# EAGLE board BlinkyBall (EAGLE 6.2)
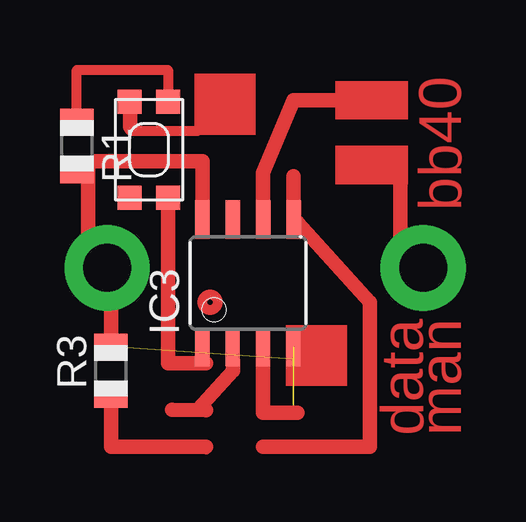
[diagram p0: board, top side]
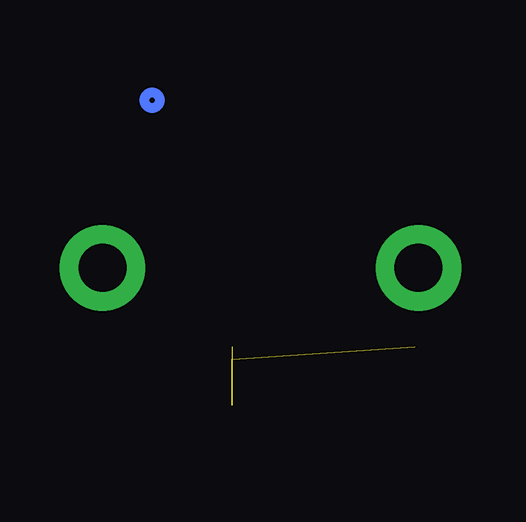
[diagram p1: board, bottom side, seen from below]

No outline drawn. Coordinates in mm, seen from the top.
Copper layers (1*16): Top 0.035mm / dielectric 1.5mm / Bottom 0.035mm
Design rules: minimum track width 10mil, minimum drill 24mil, track to track 8mil, track to pad 8mil, pad to pad 8mil, via to via 8mil, smd to smd 8mil, copper to edge 40mil, drill to drill 8mil, minimum pad ring 10mil, minimum via ring 8mil, stop-mask expansion 4mil, vias tented up to drill 0mil, thermal gap 10mil

## Footprints (pad centres in the part's own frame; a part is rotated, then mirrored left to right if it is on the bottom)
KMR2 = smd 1 x 1: 1 2,0.8; 2 2,-0.8; 3 -2,0.8; 4 -2,-0.8
8S1 = smd 0.6 x 1.6: 1 -1.905,-2.654; 2 -0.645,-2.654; 3 0.625,-2.654; 4 1.895,-2.654; 5 1.905,2.654; 6 0.635,2.654; 7 -0.635,2.654; 8 -1.905,2.654
R0805 = smd 1.1 x 1.4: 1 -1,0; 2 1,0

## Placement (x,y rotation side)
E$2  [KMR2]  5.87,14.92 90 top
IC3  TINY13-20SSU  [8S1]  10,9.37 0 top
R1  [R0805]  2.86,15.08 270 top
R3  [R0805]  4.29,5.71 90 top

## Library data of the parts
E$2 R1 R3 = adafruit
IC3 = atmel; MPN: ATTINY13-20SSU; OC_FARNELL: 1455133; OC_NEWARK: 58M3771

## Nets
N$25: IC3.5
N$26: IC3.2
N$27: IC3.3
N$28: R3.1
N$29: IC3.6
N$30: IC3.4 R3.2

## Tracks (layer width: path | path; a pad name or v marks a point on that pad's centre or on a via)
N$25
  Top 0.61: IC3.5 11.91,13.81
N$26
  Top 0.61: IC3.2 9.37,5.71 7.93,4.12 8.24,4.07 6.83,4.08
N$27
  Top 0.406: IC3.3 10.63,6.61
  Top 0.61: 10.63,6.61 10.64,4.08
N$28
  Top 0.406: 8.26,2.42 8.26,2.54
  Top 0.61: 8.26,2.54 4.29,2.54 R3.1
N$29
  Top 0.61: IC3.6 10.64,13.97 11.91,16.99 14.45,16.99
N$30  (3 unrouted)
  Top 0.406: IC3.4 11.9,6.83
  Top 0.61: 11.9,6.83 11.91,6.83 11.91,5.71
S$1
  Top 0.61: 8.1,11.91 8.1,13.81
S$2
  Top 0.61: 10.64,3.97 12.06,3.97 | 16.35,14.76 16.35,11.11
S$3  (via drill 2 pad 3.56)
  other vias: 17.3,10 4.13,10
S$4
  Top 0.406: 3.33,14.29 3.65,14.45
  Top 0.61: 3.33,11.43 3.33,14.29 | 3.65,14.45 8.1,14.45 8.1,13.81
S$5
  Top 0.406: 2.86,16.51 2.86,18.26 6.67,18.26 6.67,17.14
S$6
  Top 0.406: 5.08,15.72 7.94,15.72
S$7
  Top 0.61: 6.67,12.86 6.67,6.03 8.26,6.03
S$8
  Top 0.61: 12.06,11.91 15.08,8.57 15.08,2.54 10.64,2.54
S$9
  Top 0.61: 5.08,15.88 5.08,16.99
S$10
  Top 0.61: 4.29,7.14 4.29,8.73
(copper drawn outside any net)
  shapes: Bottom circle x1, Top area x4, Top circle x1

## Text on the board
Top: bb40 | data | man